# EAGLE board board (EAGLE 7.5.0)
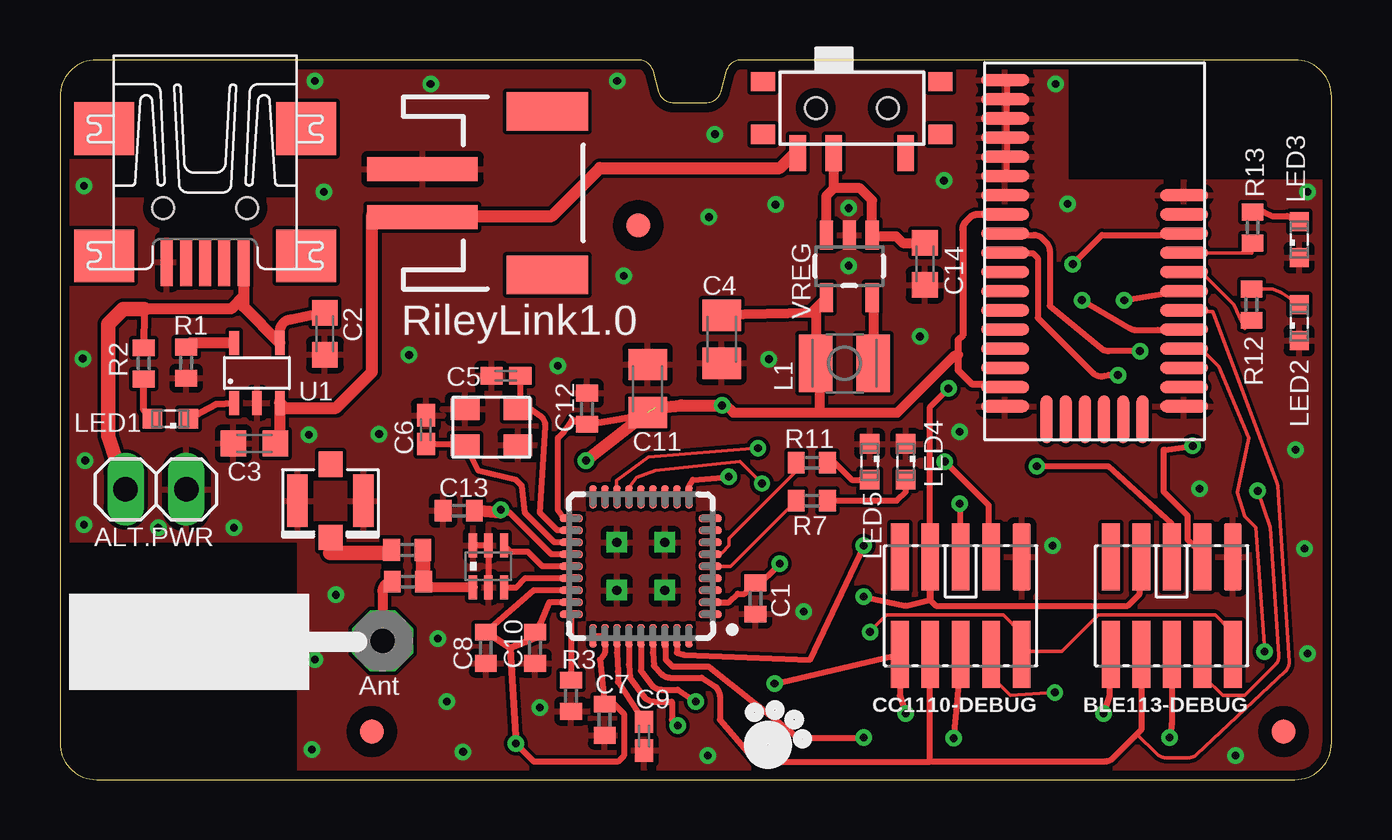
[diagram p0: board, top side]
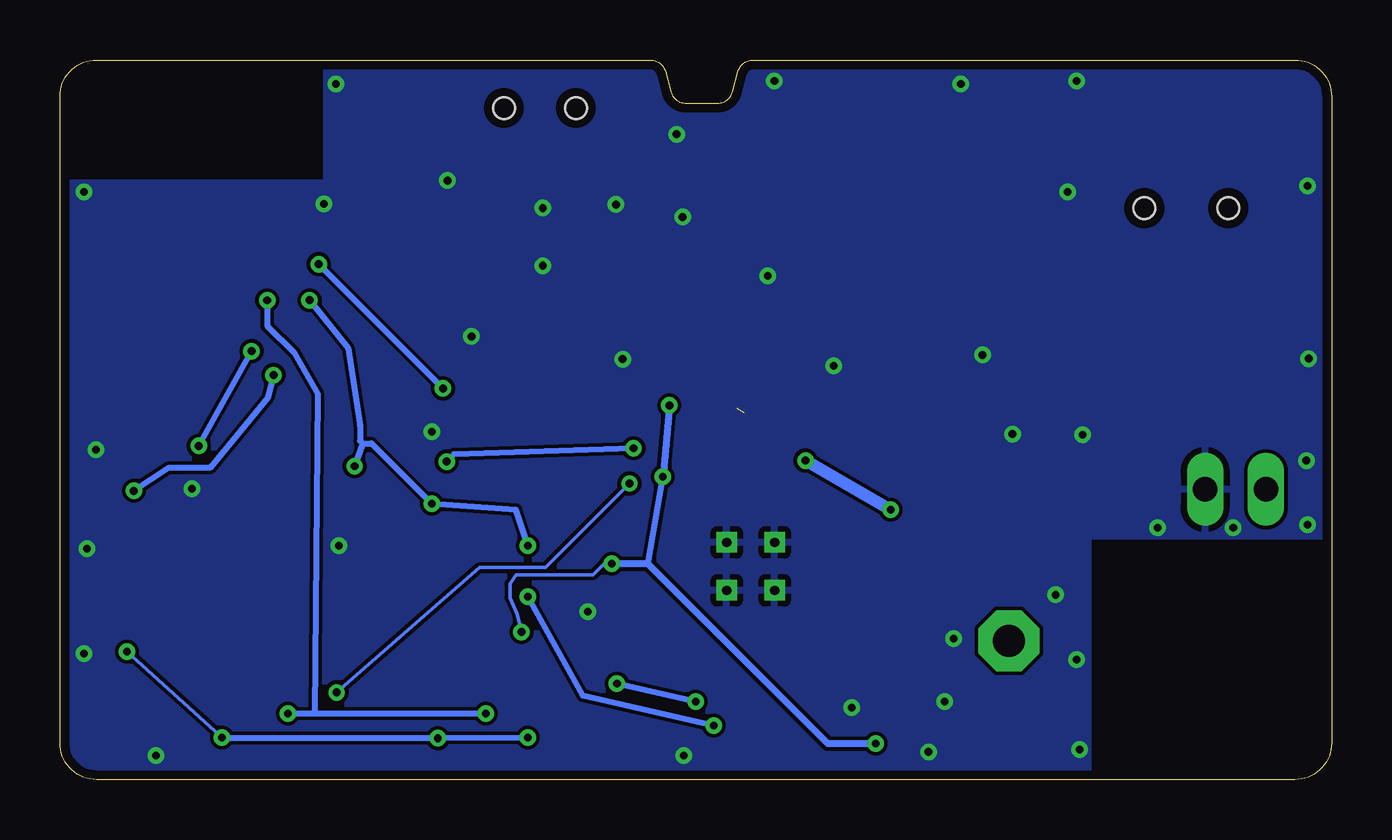
[diagram p1: board, bottom side, seen from below]

Size 53 x 30 mm. Coordinates in mm from the lower left corner, seen from the top.
Outline: 0,28.48 0,1.52 arc90 1.52,0 51.48,0 arc90 53,1.52 53,28.48 arc90 51.48,30 28.38,30 arc74 27.77,29.54 27.53,28.66 arc-74 26.92,28.2 25.58,28.2 arc-74 24.97,28.66 24.73,29.54 arc74 24.12,30 1.52,30 arc90 0,28.48
Copper layers (1*16): Top 0.0356mm / dielectric 1.5011mm / Bottom 0.0356mm
Design rules "oshpark *": minimum track width 6mil, minimum drill 13mil, track to track 6mil, track to pad 6mil, pad to pad 6mil, via to via 6mil, smd to smd 6mil, copper to edge 15mil, drill to drill 6mil, minimum pad ring 7mil, minimum via ring 7mil, stop-mask expansion 3mil, vias tented up to drill 21mil, thermal gap 10mil
bRestrict: area 0,0 to 10,10

## Footprints (pad centres in the part's own frame; a part is rotated, then mirrored left to right if it is on the bottom)
1X02 = drill 1.016 long: 1 -1.27,0; 2 1.27,0
PAD-01 = drill 1.321 pad 2.54 octagon: 1 0,0
CC-P05 = smd 0.74 x 2.8: 1 -2.54,-2.03; 2 -2.54,2.03; 3 -1.27,-2.03; 4 -1.27,2.03; 5 0,-2.03; 6 0,2.03; 7 1.27,-2.03; 8 1.27,2.03; 9 2.54,-2.03; 10 2.54,2.03
C0402 = smd 0.7 x 0.9: 1 -0.65,0; 2 0.65,0
C0603K = smd 1.05 x 1.08: 1 -0.875,0; 2 0.875,0
C0805K = smd 1.3 x 1.6: 1 -1,0; 2 1,0
C0402K = smd 0.925 x 0.74: 1 -0.6,0; 2 0.6,0
QLP-36_UPDATE = smd 0.95 x 0.3: 1 -2.9,2; 2 -2.9,1.5; 3 -2.9,1; 4 -2.9,0.5; 5 -2.9,0; 6 -2.9,-0.5; 7 -2.9,-1; 8 -2.9,-1.5; 9 -2.9,-2; 19 2.9,-2; 20 2.9,-1.5; 21 2.9,-1; 22 2.9,-0.5; 23 2.9,0; 24 2.9,0.5; 25 2.9,1; 26 2.9,1.5; 27 2.9,2 | smd 0.3 x 0.95: 10 -2,-2.9; 11 -1.5,-2.9; 12 -1,-2.9; 13 -0.5,-2.9; 14 0,-2.9; 15 0.5,-2.9; 16 1,-2.9; 17 1.5,-2.9; 18 2,-2.9; 28 2,2.9; 29 1.5,2.9; 30 1,2.9; 31 0.5,2.9; 32 0,2.9; 33 -0.5,2.9; 34 -1,2.9; 35 -1.5,2.9; 36 -2,2.9 | drill 0.381 pad 0.85 square: 37 -1,1; 38 1,1; 39 -1,-1; 40 1,-1
FIDUCIAL_1MM = smd 1 x 1: 1 0,0
0915BM15A0001 = smd 0.35 x 1: 1 -0.65,-0.875; 2 0,-0.875; 3 0.65,-0.875; 4 0.65,0.875; 5 0,0.875; 6 -0.65,0.875
U.FL = smd 2.2 x 0.85: P$1 0,1.375; P$2 0,-1.375 | smd 1.05 x 1: P$3 1.525,0; P$4 -1.525,0
JST-2-SMD = smd 1 x 4.6: 1 -1,-3.7; 2 1,-3.7 | smd 1.6 x 3.4: NC1 -3.4,1.5; NC2 3.4,1.5
L2825P = smd 1.4 x 2.4: 1 -1.2,0; 2 1.2,0
SML0603 = smd 0.8 x 0.8: A 0.75,0; C -0.75,0
SLIDE_SWITCH_SMD = smd 0.7 x 1.5: COM 0.75,1.875; NC 2.25,1.875; NO -2.25,1.875 | smd 1 x 0.8: P$1 -3.7,-1.1; P$2 -3.7,1.1; P$3 3.7,1.1; P$4 3.7,-1.1 | hole 0.9: -1.5,0; 1.5,0
R0402 = smd 0.7 x 0.9: 1 -0.65,0; 2 0.65,0
5PIN_SOT23 = smd 0.4 x 1: P$1 0.4,-0.63; P$2 1.35,-0.63; P$3 2.3,-0.63; P$4 2.3,1.87; P$5 0.4,1.87
BLE113-A = smd 2 x 0.5: AVDD -3.725,1.538; DVDD -3.725,-5.662; GND -3.725,7.138; GND@2 -3.725,6.338; GND@3 -3.725,5.537; GND@4 -3.725,4.737; GND@5 -3.725,3.938; GND@6 -3.725,3.138; GND@7 -3.725,2.337; GND@8 -3.725,-6.463; GND@9 3.725,-6.463; GND@10 3.725,2.337; NC -3.725,-4.862; NC@2 3.725,1.538; P0_0 3.725,-0.062; P0_1 3.725,-0.863; P0_2 3.725,-1.663; P0_3 3.725,-2.462; P0_4 3.725,-3.263; P0_5 3.725,-4.062; P0_6 3.725,-4.862; P0_7 3.725,-5.662; P1_6 -3.725,-2.462; P1_7 -3.725,-1.663; P2_0 -3.725,-0.863; P2_1 -3.725,-0.062; P2_2 -3.725,0.738; RESET 3.725,0.738; SCL -3.725,-3.263; SDA -3.725,-4.062 | smd 0.5 x 2: P1_0 2,-7.013; P1_1 1.2,-7.013; P1_2 0.4,-7.013; P1_3 -0.4,-7.013; P1_4 -1.2,-7.013; P1_5 -2,-7.013
SOT23-5 = smd 0.55 x 1.2: 1 -0.95,-1.3; 2 0,-1.3; 3 0.95,-1.3; 4 0.95,1.3; 5 -0.95,1.3
CTS_32X25 = smd 1.2 x 0.9: 1 -1.1,-0.7; 2 1.1,-0.7; 3 1.1,0.8; 4 -1.1,0.8
UX60-MB-5ST = smd 2 x 0.5: 1 2.25,1.6; 2 2.25,0.8; 3 2.25,0; 4 2.25,-0.8; 5 2.25,-1.6 | smd 2.2 x 2.5: M1 -3.3,-4.2; M2 -3.3,4.2; M3 2,4.2; M4 2,-4.2 | hole 0.9: 0,-1.75; 0,1.75

## Placement (x,y rotation side)
ALT.PWR  [1X02]  4,12.1 180 top
ANT1  [PAD-01]  13.45,5.78 0 top
BLE113-DEBUG  CC-DEBUG-PWR  [CC-P05]  46.34,7.25 180 top
C1  0.1uF  [C0402]  28.99,7.55 270 top
C2  4.7uF  [C0603K]  11.04,18.59 270 top
C3  4.7uF  [C0603K]  8.1,14.01 180 top
C4  10 uF  [C0805K]  27.58,18.36 270 top
C5  12pF ±5%  [C0402K]  18.59,16.84 180 top
C6  12pF ±5%  [C0402K]  15.26,14.59 90 top
C7  0.1uF  [C0402]  22.7,2.5 270 top
C8  0.1uF  [C0402]  17.75,5.5 270 top
C9  1uF  [C0402K]  24.34,1.81 90 top
C10  0.1uF  [C0402]  19.8,5.5 270 top
C11  10uF  [C0805K]  24.5,16.3 90 top
C12  0.1uF  [C0402]  21.97,15.46 90 top
C13  0.1uF  [C0402]  16.62,11.21 180 top
C14  4.7uF  [C0603K]  36.05,21.5 270 top
CC1110  CC1110  [QLP-36_UPDATE]  24.21,8.89 180 top
CC1110-DEBUG  CC-DEBUG-PWR  [CC-P05]  37.55,7.25 180 top
FID1  FIDUCIAL  [FIDUCIAL_1MM]  13,2 0 top
FID2  FIDUCIAL  [FIDUCIAL_1MM]  24.1,23.1 0 top
FID3  FIDUCIAL  [FIDUCIAL_1MM]  51,2 0 top
IC1  0915BM15A0001  [0915BM15A0001]  17.86,8.89 0 top
J1  U.FL  [U.FL]  11.28,11.62 270 top
JP1  M02-JST-2MM-SMT  [JST-2-SMD]  18.81,24.45 270 top
L1  2.2 uH  [L2825P]  32.7,17.35 0 top
LED1  red  [SML0603]  4.6,15.04 180 top
LED2  blue  [SML0603]  51.65,19.05 90 top
LED3  green  [SML0603]  51.65,22.51 90 top
LED4  green  [SML0603]  35.25,13.25 270 top
LED5  blue  [SML0603]  33.75,13.25 270 top
PWR  SW_SLIDE  [SLIDE_SWITCH_SMD]  33,28 180 top
R1  2K  [R0402]  5.26,17.38 90 top
R2  330  [R0402]  3.49,17.35 270 top
R3  56kOhm ± 1%  [R0402]  21.3,3.5 90 top
R4  [R0402]  14.47,9.57 0 top
R7  470 ohms  [R0402]  31.34,11.63 180 top
R9  [R0402]  14.5,8.25 180 top
R11  470 ohms  [R0402]  31.34,13.21 180 top
R12  470 ohms  [R0402]  49.66,19.8 270 top
R13  470 ohms  [R0402]  49.7,23.01 270 top
U1  [5PIN_SOT23]  6.86,16.33 0 top
U3  BLE113-A  [BLE113-A]  43.12,22.02 0 top
VREG  LM3671  [SOT23-5]  32.9,21.4 180 top
X1  24MHz 8pF 10ppm -20C +70C  [CTS_32X25]  17.98,14.64 0 top
X3  MINI-USB-UX60-MB-5ST  [UX60-MB-5ST]  6.05,23.83 270 top

## Library data of the parts
ALT.PWR = pinhead
ANT1 = discrete
BLE113-DEBUG CC1110-DEBUG IC1 PWR U1 = parts
C1-C14 L1 R1-R4 R7 R9 R11-R13 = rcl
CC1110 = board
FID1-FID3 = adafruit
J1 = SparkFun-Connectors; PROD_ID: CONN-09193
JP1 = SparkFun-Connectors; PROD_ID: CONN-08352
LED1-LED5 = led
U3 = sf-bluegiga; ANTENNA: On-module ceramic chip antenna
VREG = texas-custom
X1 = cts_crystal
X3 = con-hirose; OC_FARNELL: unknown; OC_NEWARK: unknown

## Nets
DC: CC1110-DEBUG.3 CC1110.16
DC_BLE: BLE113-DEBUG.3 U3.P2_2
DD: CC1110-DEBUG.4 CC1110.15
DD_BLE: BLE113-DEBUG.4 U3.P2_1
GND: ALT.PWR.1 BLE113-DEBUG.1 C1.2 C2.2 C3.2 C4.2 C5.2 C6.2 C7.2 C8.2 C9.1 C10.2 C11.2 C12.2 C13.2 C14.2 CC1110-DEBUG.1 CC1110.37 CC1110.38 CC1110.39 CC1110.40 IC1.2 IC1.5 IC1.6 J1.P$1 J1.P$2 JP1.1 LED2.C LED3.C LED4.C LED5.C R1.1 R3.1 U1.P$2 U3.GND U3.GND@2 U3.GND@3 U3.GND@4 U3.GND@5 U3.GND@6 U3.GND@7 U3.GND@8 U3.GND@9 U3.GND@10 VREG.2 X1.2 X1.4 X3.5
MISO: BLE113-DEBUG.10 CC1110-DEBUG.10 CC1110.32 U3.P0_2
MOSI: BLE113-DEBUG.8 CC1110-DEBUG.8 CC1110.33 U3.P0_3
N$2: LED1.C U1.P$1
N$3: R1.2 U1.P$5
N$4: LED1.A R2.2
N$5: CC1110.24 IC1.3
N$7: CC1110.23 IC1.4
N$9: J1.P$3 R4.1
N$10: IC1.1 R4.2 R9.1
N$12: ANT1.1 R9.2
N$14: CC1110.27 R3.2
N$16: L1.2 VREG.5
N$18: C9.2 CC1110.30
N$20: C6.1 CC1110.21 X1.1
N$21: C5.1 CC1110.20 X1.3
N$24: LED4.A R7.1
N$25: LED5.A R11.1
N$29: LED2.A R12.1
N$30: LED3.A R13.1
N$31: R12.2 U3.P0_1
N$32: R13.2 U3.P0_0
P0_0: CC1110.5 R7.2
P0_1: CC1110.6 R11.2
RESET: BLE113-DEBUG.7 CC1110-DEBUG.7 CC1110.31 U3.RESET
SCK: BLE113-DEBUG.6 CC1110-DEBUG.6 CC1110.34 U3.P0_5
SSN: BLE113-DEBUG.5 CC1110-DEBUG.5 CC1110.35 U3.P0_4
V+: C14.1 PWR.COM VREG.1 VREG.3
VBAT: C3.1 JP1.2 PWR.NC U1.P$3
VDD: BLE113-DEBUG.2 C1.1 C4.1 C7.1 C8.1 C10.1 C11.1 C12.1 C13.1 CC1110-DEBUG.2 CC1110.2 CC1110.10 CC1110.19 CC1110.22 CC1110.25 CC1110.26 CC1110.28 CC1110.29 L1.1 U3.AVDD U3.DVDD VREG.4
VIN_USB: ALT.PWR.2 C2.1 R2.1 U1.P$4 X3.1

## Tracks (layer width: path | path; a pad name or v marks a point on that pad's centre or on a via)
DC  (via drill 0.33)
  Top 0.152: v29.09,13.81 24.54,13.44 23.19,12.47 23.19,12.14 CC1110.16 | 38.71,9.3 CC1110-DEBUG.3
  Top 0.24: v36.88,13.26 38.71,11.43 38.71,9.3
  Bottom 0.152: v36.88,13.26 36.58,13.56
  Bottom 0.24: 36.58,13.56 v29.09,13.81
DC_BLE  (via drill 0.33)
  Top 0.152: 40.08,22.71 39.47,22.71 U3.P2_2 | 47.55,9.3 BLE113-DEBUG.3
  Top 0.24: 47.55,9.3 47.55,9.45 47,10 47,11 46,12 46,13.75 46.06,13.75 v47.22,13.91 | 40.08,22.71 40.58,22.71 arc-45 40.94,22.56 41.1,22.4 arc-45 41.25,22.04 41.25,19.75 43.38,18
  Top 0.254: v45.01,17.86 43.71,17.86 arc-45 43.38,18
  Bottom 0.24: v47.22,13.91 v45.01,17.86
DD  (via drill 0.33)
  Top 0.152: v29.26,12.34 28.35,13.26 24.81,12.88 24.02,12.59 23.77,12.26 CC1110.15 | v41.47,3.63 39.62,3.5 38.86,4.27 38.86,5.18 CC1110-DEBUG.4
  Bottom 0.152: v29.26,12.34 32.77,8.84 35.51,8.84 v41.47,3.63
DD_BLE  (via drill 0.33)
  Top 0.152: 40.08,21.95 39.47,21.95 U3.P2_1 | v49.92,12.04 50.44,10.52 50.8,5.18 arc-49 50.66,4.78 49.38,3.5 48.46,3.5 47.7,4.27 47.7,5.18 BLE113-DEBUG.4
  Top 0.24: 40.08,21.95 40.55,21.95 40.75,21.75 40.75,19.25 43.04,16.96 arc60 43.53,16.83 43.71,16.88 v44.1,16.86
  Bottom 0.24: v44.1,16.86 44.35,15.9 46.75,13 48.46,13 v49.92,12.04
GND  (via drill 0.33, 0.33 pad 0.41)
  Top 0.152: 39.47,28.5 U3.GND@2 39.47,28.35 | 39.47,29.11 U3.GND | 39.47,26.06 U3.GND@5 39.47,25.91 | 39.47,26.67 U3.GND@4 39.47,26.82 | 39.47,27.43 U3.GND@3 39.47,27.58 | 39.47,25.3 U3.GND@6
  Top 0.24: 39.47,29.11 39.47,28.5 | 39.47,26.67 39.47,26.06 | 39.47,26.82 39.47,27.43 | 39.47,27.58 39.47,28.35 | 39.47,25.3 39.47,25.91
  Top 0.26: C10.2 20,5 | IC1.2 IC1.5 IC1.6
  other vias: 11.5,7.7 11,24.5 27.3,26.9 27.05,23.45 52,24.5 23.5,21 51.88,9.62 52,5.25 51.5,13.75 49,1 41.38,9.75 20.75,17.25 10.38,14.38 14.55,17.7 10.62,5 15.75,5.88 16.8,1.15 13.3,14.4 41.5,29 42,24 31,7 20,3 27,1 47.5,12.12 37.5,14.5 35.85,18.48 1,10.62 7.25,10.5 0.95,17.55 1,24.75 29.82,23.98 23.23,29.12 15.45,29 10.62,29.12 10.5,1.25 16.12,3.25 29.55,17.52 36.85,24.98 4.1,10.5 1.05,13.3 32.88,23.82 32.88,21.43
  pour Bottom: 0,30 53,30 53,0 0,0
  pour Top (rank 2): 10,0 10,10 0,10 0,30 53,30 53,0
  pour Top (no thermals): 32.65,23.3 32.3,23.55 32.3,23.7 33.5,23.65 33.2,23.3
  pour Top (no thermals): 32.65,22.1 32.35,21.95 32.6,21.7 33.35,21.75 33.45,21.95 33.15,22.1
MISO  (via drill 0.33)
  Top 0.152: 46.02,20.27 46.79,20.27 U3.P0_2
  Top 0.24: CC1110.32 24.21,4.54 24.65,3.95 arc53 25.05,3.75 25.75,3.75 v26.5,3.25 | v29.79,4 CC1110-DEBUG.10 35.01,3.5 v35.25,2.75 | v43.5,2.75 43.75,3.5 43.75,5.17 BLE113-DEBUG.10 | v44.36,19.98 46.02,20.27
  Bottom 0.152: 42.37,2.74 42.37,2.75
  Bottom 0.24: v26.5,3.25 v29.79,4 | v35.25,2.75 42.37,2.75 | 42.37,2.75 v43.5,2.75 | 42.37,2.75 42.24,16.05 43.25,17.8
  Bottom 0.254: v44.36,19.98 44.36,18.91 43.25,17.8
MOSI
  Top 0.152: 44.89,1.89 45.72,1.06 arc45 46.08,0.91 47.04,0.91 arc43 47.39,1.05 51.07,4.5 arc51 51.23,4.91 50.75,12.23 arc17 50.72,12.38 48.05,19.51 46.94,19.51 U3.P0_3
  Top 0.24: CC1110.33 24.71,5.29 24.75,4.75 25.05,4.42 arc48 25.43,4.25 26.75,4.25 27.27,3.9 arc-56 27.5,3.48 27.5,2.5 29,0.75 36.25,0.75 | 36.25,0.75 36.25,4.45 CC1110-DEBUG.8 | BLE113-DEBUG.8 45.07,2.07 44.89,1.89 43.9,0.9 arc-45 43.54,0.75 36.25,0.75
N$2
  Top 0.3: LED1.C 6.51,15.65 U1.P$1
N$3
  Top 0.45: U1.P$5 5.43,18.2 R1.2
N$4
  Top 0.3: LED1.A 3.49,15.4 R2.2
N$5
  Top 0.26: CC1110.24 19.39,8.39 19,8 18.52,8 IC1.3
N$7
  Top 0.26: CC1110.23 20.11,8.89 19.5,9.5 18.77,9.5 IC1.4
N$9
  Top 0.6: R4.1 13.7,9.45 11.25,9.45 11.28,9.47 J1.P$3
N$10
  Top 0: R9.1 15.12,8.28
  Top 0.24: 17.25,7.97 IC1.1 17.2,8
  Top 0.406: IC1.1 15.38,8.02 arc-90 R9.1
  Top 0.6: 15.12,8.28 R4.2
N$12
  Top 0.406: R9.2 arc90 13.45,7.84 ANT1.1
N$14
  Top 0.26: CC1110.27 21.31,5 R3.2
N$16
  Top 0.406: VREG.5 33.9,20.05 L1.2
N$18
  Top 0.26: CC1110.30 23.21,5.29 23.25,4.5 23.25,4.07 C9.2
N$20
  Top 0.24: CC1110.21 20.61,9.89 19.38,11.12 19.25,12.25 19,12.5 17.45,12.88 X1.1 16.84,13.98 C6.1
N$21
  Top 0.24: CC1110.20 20.73,10.39 20,11.12 20.23,14.72 arc58 20.02,15.16 19.38,15.62 19,15.62 19.08,15.54 19.18,15.54 | C5.1 19.18,15.54 | 19.18,15.54 X1.3
N$24
  Top 0.24: R7.1 34.88,11.63 35.25,12 LED4.A
N$25
  Top 0.24: R11.1 32.3,13.21 33,12.5 LED5.A
N$29
  Top 0.152: LED2.A 50.9,20.3 50.54,20.44 R12.1
N$30
  Top 0.24: R13.1 50.16,23.66 50.5,23.5 51.14,23.5 LED3.A
N$31
  Top 0.152: R12.2 49.39,18.81 48.92,19.81 47.7,21.03 46.94,21.03 U3.P0_1
N$32
  Top 0.152: R13.2 49.68,21.95 46.94,21.95 U3.P0_0
P0_0
  Top 0.152: CC1110.5 27.95,8.89 R7.2
P0_1
  Top 0.152: R11.2 30.63,13.11 30.63,12.8 27.89,10.06 27.89,9.75 27.58,9.45 27.13,9.45 CC1110.6
RESET  (via drill 0.33)
  Top 0.152: 46.79,22.71 U3.RESET | 36.27,15.54 36.25,15.5
  Top 0.24: CC1110.31 23.71,4.79 23.75,4.25 24.35,3.45 arc53 24.75,3.25 25.5,3.25 25.5,2.5 v25.75,2.25 | v33.5,7.62 35.25,7.25 36.25,7.5 36.25,8.64 | 36.25,8.64 CC1110-DEBUG.7 36.27,7.47 36.5,7.25 44.5,7.25 45,7.75 45,8.46 BLE113-DEBUG.7 | 36.25,8.64 36.25,15.5 | 46.79,22.71 43.43,22.71 v42.22,21.49 | 36.27,15.54 v37.03,16.31
  Bottom 0.24: v25.75,2.25 31.2,3.5 v33.5,7.62 | v37.03,16.31 v42.22,21.49
SCK  (via drill 0.33)
  Top 0.152: v50.21,5.33 49.84,10.52 49.38,10.97 49.07,11.97 49.56,14.23 48.31,17.22 47.7,17.83 46.94,17.83 U3.P0_5
  Top 0.24: 25.21,5.54 CC1110.34 25.25,5.95 25.25,5 25.55,4.7 27.05,4.7 30.61,1.86 arc39 30.93,1.75 v33.5,1.75 | v37.25,1.72 37.5,4.42 CC1110-DEBUG.6 | BLE113-DEBUG.6 46.34,2.34 v46.25,1.75
  Bottom 0.152: v50.21,5.33 46.33,1.83 v46.25,1.75
  Bottom 0.24: v33.5,1.75 v37.25,1.72 37.47,1.75 v46.25,1.75
SSN  (via drill 0.33)
  Top 0.152: 46.79,18.75 U3.P0_4 | 46.33,10.67 46.33,9.3 BLE113-DEBUG.5
  Top 0.24: CC1110.35 25.71,5.29 26,5.2 31.25,5 v33.5,9.75 | v37.5,11.5 37.5,8.57 CC1110-DEBUG.5 | 46.33,10.67 43.68,13.06 v40.72,13.06 | v42.6,19.98 44.61,18.8 arc31 44.88,18.74 45.75,18.75 U3.P0_4
  Bottom 0.152: 37.64,11.58 v37.5,11.5
  Bottom 0.24: v33.5,9.75 34,11.25 v37.5,11.5 40.02,14.02 40.39,14.02 | 40.39,14.02 v40.72,13.06 | v42.6,19.98 40.98,17.98 40.5,14.75 40.5,14.13 40.39,14.02
V+
  Top 0.406: VREG.3 31.95,24.35 32.25,24.65 | 32.25,24.65 PWR.COM | C14.1 35.12,22.38 34.85,22.65 33.9,22.65 VREG.1 33.85,24.15 33.35,24.65 32.25,24.65
VBAT
  Top 0.45: U1.P$3 9.16,14.19 C3.1
  Top 0.5: U1.P$3 9.36,15.5 11.5,15.5 13,17 13,23.5 13.05,23.45 JP1.2 15.16,23.5 20.5,23.5 22.5,25.5 30,25.5 30.62,26.12 PWR.NC
VDD  (via drill 0.33)  (1 unrouted)
  Top 0.152: BLE113-DEBUG.2 48.77,5.33 48.77,6.25 48.16,6.86 43.28,6.86 41.76,5.33 40.23,5.33 CC1110-DEBUG.2 40.08,5.33 40.08,6.1 39.32,6.86 34.44,6.86 34.14,6.55 v33.76,6.15 | 38.56,16.46 39.32,16.46 U3.DVDD
  Top 0.24: v30,9 28.95,7.95 C1.1 28.54,7.75 28.25,7.75 27.89,7.39 CC1110.2 | 23.5,2.75 23.5,1 23.25,0.75 19.75,0.75 v19,1.5 | CC1110.10 26.21,12.21 26.38,12.5 v27.88,12.62 | CC1110.19 21.02,10.89 20.75,11.25 20.75,14.25 21,14.5 21.36,15 | CC1110.22 20.48,9.39 18.75,11.12 18.36,11.12 18.36,11.23 v18.38,11.25
  Top 0.26: CC1110.25 19.74,7.89 C8.1 18,6 | CC1110.26 20.39,7.39 20,6.5 C10.1 20,6 | CC1110.28 CC1110.29 22.71,5.29 22.5,5 C7.1 23,3.25 23.5,2.75
  Top 0.3: 18,6 18.75,5.5 | 20,6 18.75,5.5 | 18.75,5.5 v19,1.5 | 38.56,16.46 38.52,16.5 38,16.5 37.44,17.06 37.44,17.7 37.44,18.32 37.62,18.51 37.62,22.91 arc-45 37.77,23.27 37.91,23.41 arc-45 38.27,23.56 U3.AVDD | C11.1 23.8,15.11 C12.1 21.36,15 | 29.85,15.35 31.3,15.3
  Top 0.406: v27.6,15.6 27.61,15.61 arc-45 28.06,15.3 31.3,15.3 31.65,15.3 | 31.65,15.3 34.9,15.3 37.2,17.6 arc-45 37.44,17.7 | C4.1 31.3,19.45 VREG.4 31.5,19.65 L1.1 31.65,17.2 31.65,15.3
  Top 0.5: 18.36,11.12 C13.1 | 24.8,15.5 25.89,15.6 v27.6,15.6 | v21.93,13.3 C11.1
  Bottom 0.152: v33.76,6.15 33.94,6.9 34.25,7.58 34.25,8.15 33.98,8.53 30.79,8.53 30.33,8.99 30.02,8.99 v30,9
  Bottom 0.26: 28.5,9 v27.88,12.62
  Bottom 0.3: v19,1.5 21,1.5 28.5,9 v30,9 | v27.6,15.6 v27.88,12.62
  Bottom 0.5: v18.38,11.25 v21.93,13.3
VIN_USB
  Top 0.3: 3.52,19.62 R2.1
  Top 0.406: C2.1 9.67,19.18 arc90 9.16,18.68 U1.P$4
  Top 0.45: U1.P$4 7.65,19.71 X3.1 7.65,20.15 7.12,19.62 3.52,19.62
  Top 0.6: ALT.PWR.2 2,14.33 2,19 2.62,19.62 3.52,19.62

## Text on the board
tNames: RileyLink1.0 | Ant